# Altium PCB ScopePower.PcbDoc
Units mil, origin at the board's own origin, x right, y up, seen from the top; angles counter-clockwise.
Board outline 1900 x 3300.97 mil, 2 copper layers (Top Layer, Bottom Layer); 37 components, 18 nets, 89 pads, 50 vias.
Unrouted connection lines stored in the file: 2.
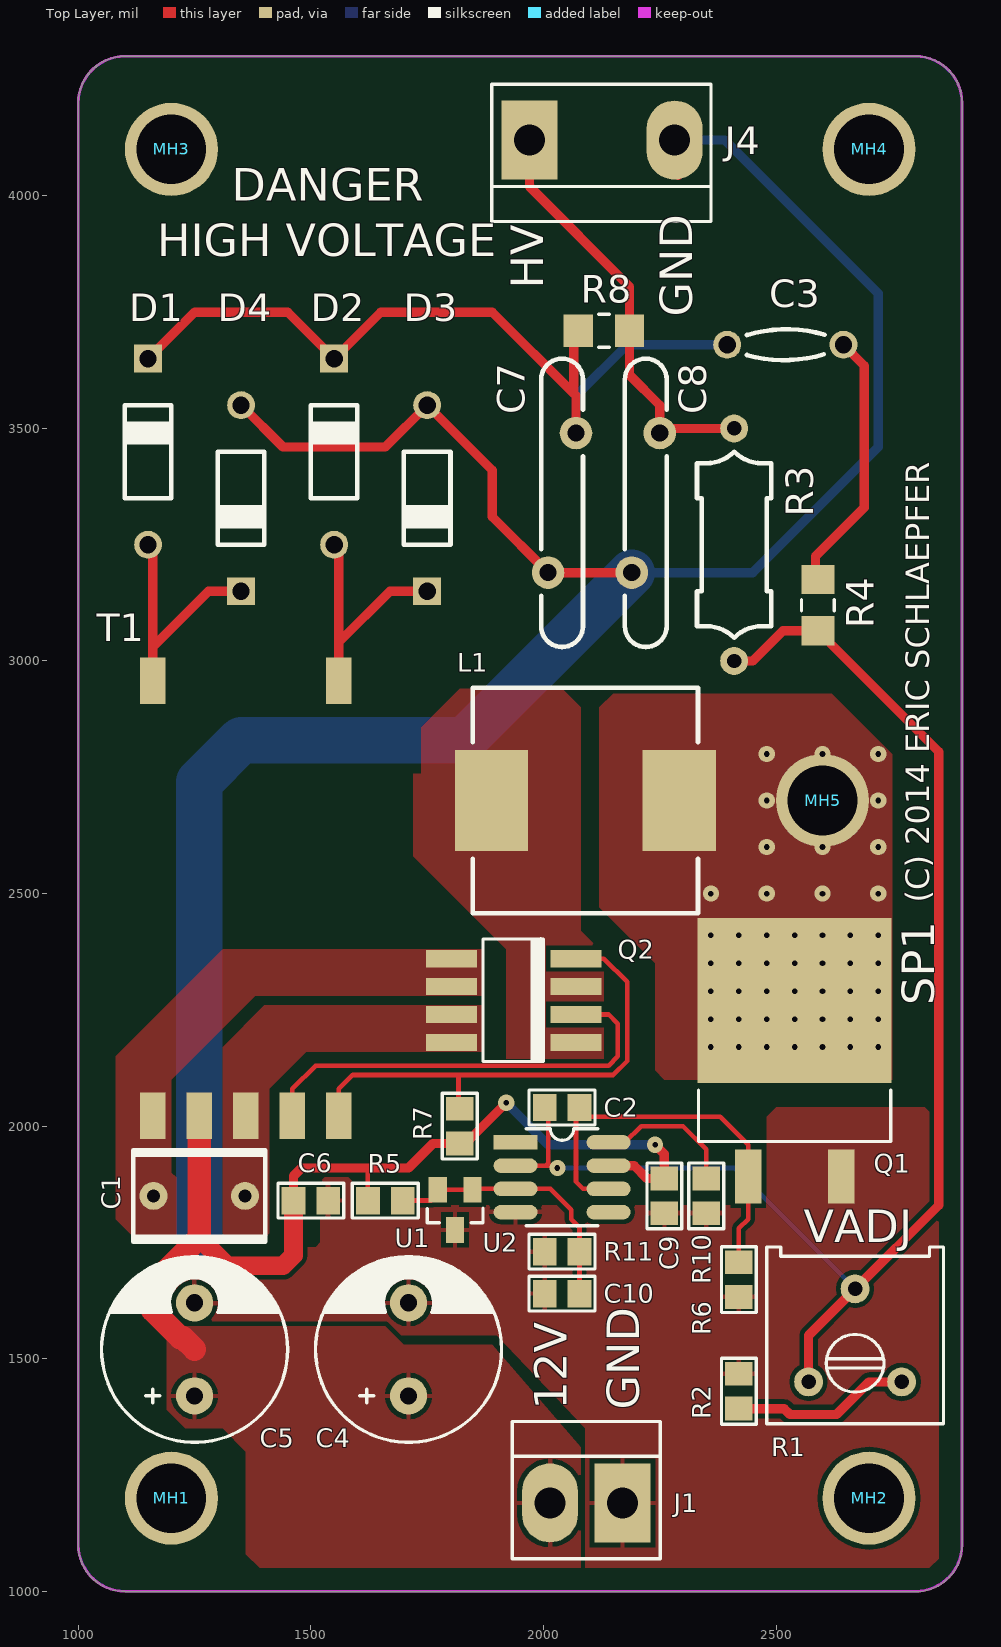
[diagram p0: Top Layer view]
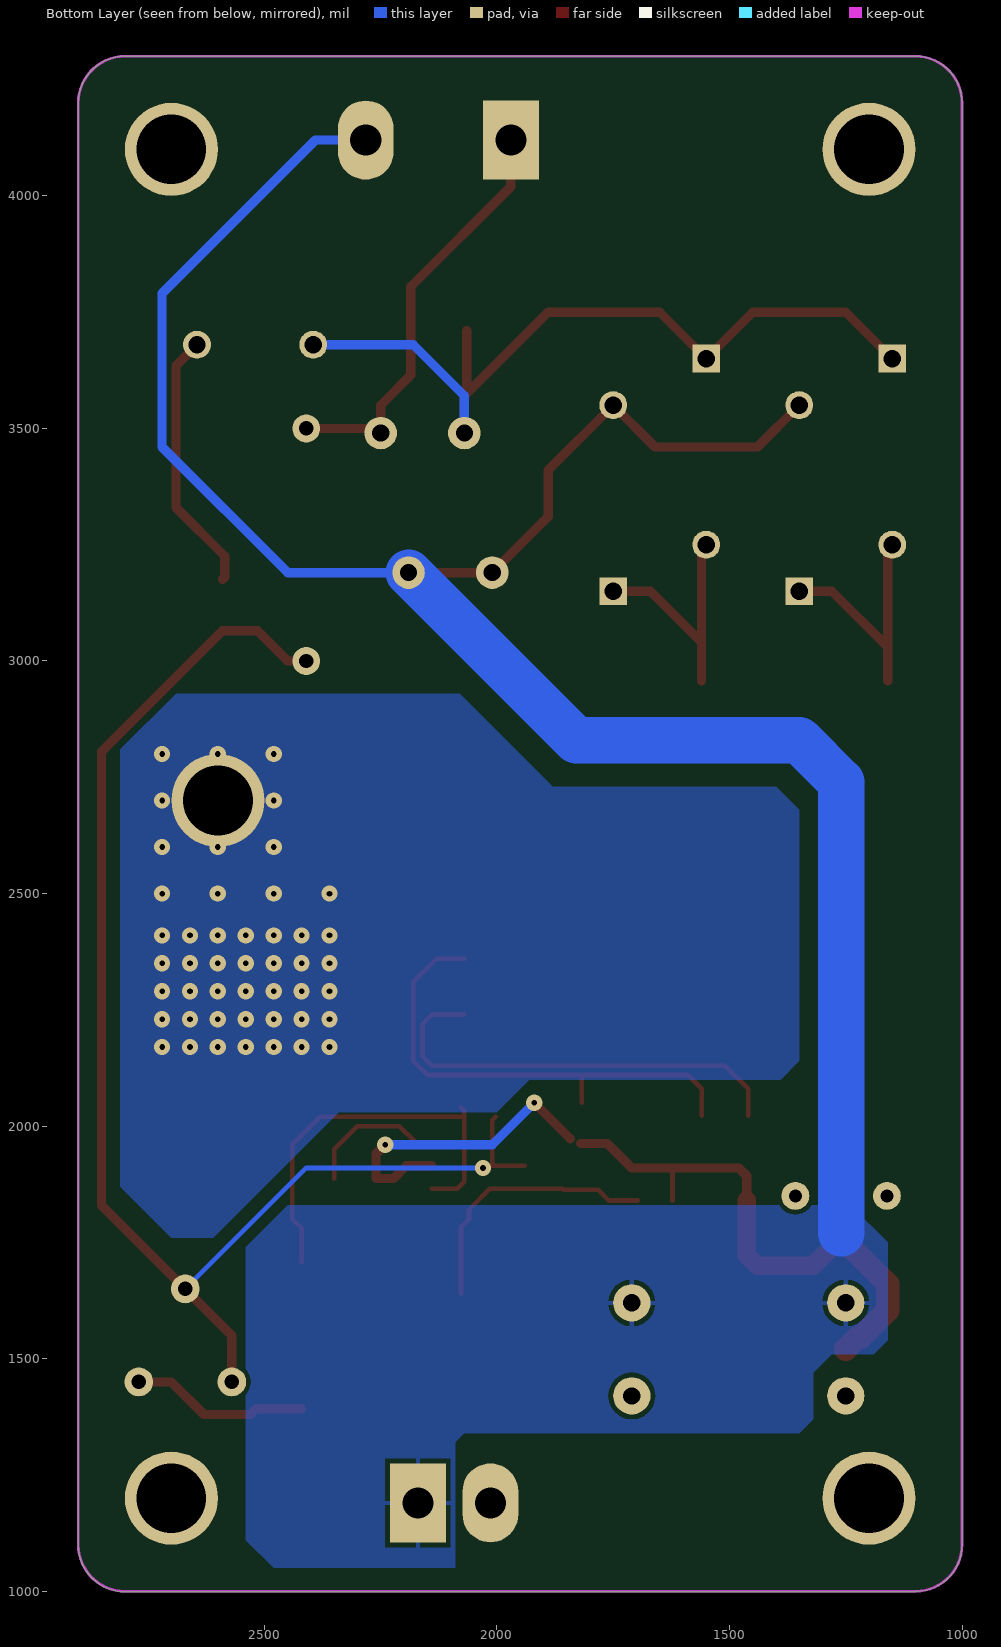
[diagram p1: Bottom Layer view, seen from below]

## Layer stack, top to bottom
Top Solder: solder mask 0.4, Solder Resist, Dk 3.5
Top Layer: signal copper 1.4
Dielectric 1: dielectric 12.6, FR-4, Dk 4.8
Bottom Layer: signal copper 1.4
Bottom Solder: solder mask 0.4, Solder Resist, Dk 3.5

## Board outline
1100,999.52 cw(c1100,1099.52) 1000,1099.52 1000,1100 1000,4200 cw(c1100,4200) 1100,4300 2800,4300 cw(c2800,4200) 2900,4200 2900,1100 2900,1099.03 cw(c2800,1099.03) 2800,999.03 1100,999.03

## Design rules (kind name [scope] priority, off if disabled: settings)
Clearance Clearance_HV [InNetClass('HV')] p1: gap=100
Clearance [All] p2: gap=10
HoleSize [All] p1: absolutevalues=TRUE maxlimit=150 minlimit=12 maxpercent=80.000 minpercent=20.000
PolygonConnect PolyConnectPower [InNet('NetC1_1') or InNet('NetC1_2') or InNet('NetL1_1') or InComponent('Q1') or InComponent('Q2') or InComponent('L1')] p1: connectstyle=Direct reliefconductorwidth=10 reliefentries=4 polygonreliefangle="90 Angle" airgapwidth=10
PolygonConnect [All] p2: connectstyle=Relief reliefconductorwidth=10 reliefentries=4 polygonreliefangle="90 Angle" airgapwidth=10
RoutingVias [All] p1: holewidth=12 width=35 viastyle="Through Hole" minholewidth=12 minwidth=35 maxholewidth=28 maxwidth=50
ShortCircuit ShortCircuit_1 [All vs InNet('NetL1_1')] p1: allowed=TRUE
ShortCircuit [All] p2: allowed=FALSE
SilkToSolderMaskClearance [IsPad] p1: minsilkscreentomaskgap=2 clearancetoexposedcopper=TRUE
SolderMaskExpansion [All] p1: expansion=4
Width [All] p1: maxlimit=200 minlimit=10 preferedwidth=10 minimp=50.000000 maximp=50.000000 favimp=50.000000
26 further rules are at their usual default settings.

## Classes and differential pairs
component class ScopePower: C1 C2 C3 C4 C5 C6 C7 C8 C9 C10 D1 D2 D3 D4 J1 J4 L1 Q1 Q2 R1 R2 R3 R4 R5 R6 R7 R8 R10 R11 T1 U1 U2
net class HV: NetC3_2 NetC8_1 NetD1_A NetD2_A

## Components (designator, comment, footprint, x,y, rotation, side; value= is the part's Value field where it differs from the comment)
C1 "Cap" WIMAMKP2 1260,1850 r0 top
C2 "" G_0805[2012] 2040,2040 r0 top
C3 "3KV" CAP250X100 2520,3680 r180 top
C4 "Cap Pol2" CAP_R200x400 1710,1520 r90 top
C5 "Cap Pol2" CAP_R200x400 1250,1520 r90 top
C6 "" G_0805[2012] 1500,1840 r0 top
C7 "2KV" CAP400X100 2040,3340 r90 top
C8 "2KV" CAP400X100 2220,3340 r270 top
C9 "" G_0805[2012] 2260,1850 r270 top
C10 "Cap" G_0805[2012] 2040,1640 r0 top
D1 "Diode" DIODE400X100 1150,3450 r90 top
D2 "Diode" DIODE400X100 1550,3450 r90 top
D3 "Diode" DIODE400X100 1750,3350 r270 top
D4 "Diode" DIODE400X100 1350,3350 r270 top
J1 "+12V" HDR2S156 2170,1190 r270 top
J4 "HV" HDR3S156M1 1970,4120 r90 top
L1 "DR127-151" DR124 2090,2700 r180 top
MH1 "Comment" M_MTHOLE 1200,1200 r0 top
MH2 "Comment" M_MTHOLE 2700,1200 r0 top
MH3 "Comment" M_MTHOLE 1200,4100 r0 top
MH4 "Comment" M_MTHOLE 2700,4100 r0 top
MH5 "Comment" M_MTHOLE 2600,2700 r0 top
Q1 "FDB3502" G_TO252M[D2PAK] 2540,2140 r0 top
Q2 "ZDT1048" G_SOT223-8 2070,2180 r180 top
R1 "ADJ" "POT_TRIM BOURNS 3386F" 2670,1550 r180 top
R2 "Res1" G_0805[2012] 2420,1430 r270 top
R3 "VR37000001005JR500" RES500X160 2410,3250 r90 top
R4 "*" G_1206[3216] 2590,3120 r90 top
R5 "" G_0805[2012] 1660,1840 r0 top
R6 "" G_0805[2012] 2420,1670 r270 top
R7 "Res1" G_0805[2012] 1820,2000 r270 top
R8 "Res1" G_1206[3216] 2130,3710 r0 top
R10 "" G_0805[2012] 2350,1850 r270 top
R11 "" G_0805[2012] 2040,1730 r180 top
T1 "CCFL_C" CTX2106XX 1360,2490 r0 top
U1 "ZTL431A" G_SOT23 1810,1820 r180 top
U2 "TS271" G_SO8 2040,1890 r0 top

## Footprints (in the part's own frame and the unit in brackets; to place one, negate y for a bottom-side part, rotate by r counter-clockwise, add the part's x,y. Pads: shape width x height; smd on the part's side, far side on the other; paste and mask are expansions set on the pad)
CAP250X100 [mil] "Capacitor, 250mil x 100mil"
  round 60 hole 37: 1(-125,0) 2(125,0)
  silkscreen extent -84,-33 83,33
CAP400X100 [mil] "Capacitor, 400mil x 100mil"
  round 70 hole 37: 1(-150,30) 2(150,-30)
  silkscreen extent -310,-45 310,45
CAP_R200x400 [mil]
  round 80 hole 37: 1(-100,0) 2(100,0)
  silkscreen extent -200,-200 200,200, body extent -200,-200 200,200, height 800
CTX2106XX [mil] "Coiltronics CCFL Transformer Layout C"
  rect 55x100 smd: 1(-200,-467.5) 2(-100,-467.5) 3(0,-467.5) 4(100,-467.5) 5(200,-467.5) 6(200,467.5) 10(-200,467.5)
  body extent -325,-413 325,413, height 276
DIODE400X100 [mil] "Diode, 400mil x 100mil"
  round 60 hole 37: A(-200,0)
  rect 60x60 hole 37: K(200,0)
  silkscreen extent -100,-50 100,50
DR124 [mm]
  rect 4x5.5 smd: 1(-5.125,0) 2(5.125,0)
  silkscreen extent -6.15,-6.15 6.15,6.15
G_0805[2012] [mm] "Generic 0805"
  rect 1.3x1.5 smd: 1(-0.95,0) 2(0.95,0)
  silkscreen extent -1.8,-0.95 1.8,0.95, body extent -1,-0.6 1,0.6
G_1206[3216] [mm] "Generic 1206"
  rect 1.6x1.8 smd: 1(-1.4,0) 2(1.4,0)
  silkscreen extent -0.3,-0.9 0.3,0.9, body extent -1.6,-0.8 1.6,0.8
G_SO8 [mm]
  rect 2.4x0.8 smd: 1(-2.54,1.905)
  oval 2.4x0.8 smd: 2(-2.54,0.635) 3(-2.54,-0.635) 4(-2.54,-1.905) 5(2.54,-1.905) 6(2.54,-0.635) 7(2.54,0.635) 8(2.54,1.905)
  silkscreen extent -1.96,-2.64 1.96,2.65, body extent -2.03,-2.54 2.03,2.54
G_SOT23 [mm]
  rect 1x1.4 smd: 1(-0.95,-1.1) 2(0.95,-1.1) 3(0,1.1)
  silkscreen extent -1.52,-0.1 1.52,0.71, body extent -1.45,-0.64 1.45,0.64
G_SOT223-8 [mil] "SOT223, 8-Leads"
  rect 110x37 smd: 1(0,0) 2(0,-60) 3(0,-120) 4(0,-180) 5(268,-180) 6(268,-120) 7(268,-60) 8(268,0)
  silkscreen extent 70,-223 200,41, body extent 61,-222 207,41, height 71
G_TO252M[D2PAK] [mm]
  rect 10.6x9 smd: D(0,3.3)
  rect 1.45x2.95 smd: G(-2.54,-6.3) S(2.54,-6.3)
  silkscreen extent -5.25,-4.4 5.25,-1.6, body extent -5.25,-1.6 5.25,7.8
HDR2S156 [mil]
  rect 170x120 hole 67: 1(0,0)
  oval 170x120 hole 67: 2(0,-156)
  silkscreen extent -175,-237 120,81, body extent -194,-231 200,75, height 585
HDR3S156M1 [mil]
  rect 170x120 hole 67: 1(0,0)
  oval 170x120 hole 67: 2(0,-312)
  silkscreen extent -175,-390 120,81
M_MTHOLE [mil]
  round 200 hole 150: 1(0,0)
"POT_TRIM BOURNS 3386F" [mil]
  round 62 hole 31: 1(-100,100) 2(100,100) 3(0,-100)
  silkscreen extent -190,-190 190,190, body extent -190,-190 190,190
RES500X160 [mil] "Resistor, 500mil x 160mil"
  round 60 hole 31: 1(-250,0) 2(250,0)
  silkscreen extent -200,-80 200,80
WIMAMKP2 [mil] "Wima Capacitor, MPK2 Series"
  round 60 hole 27.99: 1(-98.43,0) 2(98.43,0)
  silkscreen extent -142,-98 142,98, body extent -142,-89 142,89, height 374

## Part data
C1 C10: "Capacitor"
C2 C3 C6 C7 C8 C9: library part Cap, "Capacitor"
C4 C5: library part CapP, "Polarized Capacitor"
J1 J4: library part CON2, "Connector, 2 pin"
L1: library part Inductor, "Inductor"
Q1: library part MOSFET-N, "N-Channel MOSFET"
Q2: library part NPN_DUAL, "NPN Dual Bipolar Transistor"
R1: library part Pot, "Variable Resistor"
R2 R4 R5 R6 R7 R8 R10 R11: library part Res, "Resistor"
R3: library part ResSpecial, "Resistor, Special Property"
T1: "CCFL Transformer"
U1: library part TL431, "Adjustable Shunt Reg"
U2: library part OpAmpSingle, "Generic Single Op Amp"

## Via types
v1: diameter 35, hole 12, Top Layer to Bottom Layer, 50 vias

## Nets (pads, with @x,y where several pads share a name; then routed paths per layer and width w, separated by ;. In a path a pad name is that pad's centre, name@x,y a point inside that pad or via, vN(x,y) a via of type N, cw(c..) or ccw(c..) an arc to the next point about the centre after c; other vN are vias at no path point)
GND: C4.2 C5.2 C6.2 C7.1 C8.2 C9.2 C10.1 D3.A D4.A J1.1 J4.2 Q1.S R2.1 R6.2 R10.2 R11.2 U1.3 U2.4 | length 4830.9
  Top Layer w20: D4.A 1440,3460 1660,3460 D3.A 1890,3410 1890,3310 C7.1 C8.2 ; J4.2@2290,4044.29 J4.2@2290,4120
  Bottom Layer w20: C8.2 2450,3190 2720,3460 2720,3790 2390,4120 J4.2
  Bottom Layer w100: 1260,1770 1260,2740 1350,2830 1830,2830 C8.2
NetC1_1: C1.1 Q2.5 Q2.6 T1.1
NetC1_2: C1.2 Q2.7 Q2.8 T1.3
NetC2_1: C2.1 R1.2 R1.3 R3.1 R4.1 U2.2 | length 3012.4
  Top Layer w10: U2.2 v1@2015,1915 ; C2.1@2002.6,2020 2010,2012.6 2010,1920 2005,1915 v1@2015,1915 ; v1(2030,1910) v1@2020,1910 ; v1@2015,1915 v1@2020,1910 ; v1@2015,1915 v1@2020,1910
  Top Layer w20: R3.1 2450,3000 2514.88,3064.88 R4.1 2850,2804.88 2850,1830 R1.3 2570,1550 R1.2
  Bottom Layer w10: v1(2030,1910) 2410,1910 R1.3
NetC2_2: C2.2 Q1.G R6.1 U2.6 | length 887.6
  Top Layer w10: C2.2@2077.4,2020 2380,2020 2440,1960 Q1.G 2440,1800 2420,1780 R6.1 ; C2.2 2070,2032.6 2070,1880 2085,1865 U2.6
NetC3_1: C3.1 R4.2 | length 569.1
  Top Layer w20: R4.2 2585,3180.12 2585,3225 2690,3330 2690,3635 C3.1
NetC3_2: C3.2 C7.2 D1.K D2.K R8.1 | length 1784.3
  Top Layer w20: D1.K 1250,3750 1450,3750 D2.K 1650,3750 1890,3750 2064.88,3575.12 ; R8.1@2064.88,3710 2064.88,3575.12 ; C7.2 2070,3570 2064.88,3575.12
  Bottom Layer w20: C7.2 2070,3570 2180,3680 C3.2
NetC8_1: C8.1 J4.1 R3.2 R8.2 | length 910.1
  Top Layer w20: J4.1 1970,4020 2185.12,3804.88 R8.2 2185.12,3614.88 2250,3550 C8.1 2260,3500 R3.2
NetC10_2: C10.2 R5.2 R11.1 U1.1 U1.2 U2.3 | length 578.8
  Top Layer w10: R5.2 1759.29,1840 1782.6,1863.31 1857.4,1863.31 1859.09,1865 U2.3 2015,1865 2060,1820 2060,1800 2077.4,1782.6 R11.1 C10.2
NetD1_A: D1.A D4.K T1.10 | length 536.3
  Top Layer w20: D1.A 1160,3240 1160,3030 ; T1.10 1160,3030 ; D4.K 1280,3150 1160,3030
NetD2_A: D2.A D3.K T1.6 | length 532.2
  Top Layer w20: D2.A 1560,3240 1560,3040 ; T1.6 1560,3040 ; D3.K 1670,3150 1560,3040
NetL1_1: L1.1 MH5.1 Q1.D
  other v1: 2360,2170 2420,2170 2480,2170 2540,2170 2600,2170 2660,2170 2720,2170 2360,2230 2420,2230 2480,2230 2540,2230 2600,2230 2660,2230 2720,2230 2360,2290 2420,2290 2480,2290 2540,2290 2600,2290 2660,2290 2720,2290 2360,2350 2420,2350 2480,2350 2540,2350 2600,2350 2660,2350 2720,2350 2360,2410 2420,2410 2480,2410 2540,2410 2600,2410 2660,2410 2720,2410 2360,2500 2480,2500 2600,2500 2720,2500 2480,2600 2600,2600 2720,2600 2480,2700 2720,2700 2480,2800 2600,2800 2720,2800
NetL1_2: L1.2 Q2.1 Q2.3
NetQ2_2: Q2.2 T1.4 | length 954.8
  Top Layer w10: T1.4 1460,2080 1510,2130 2140,2130 2160,2150 2160,2220 2140,2240 Q2.2
NetQ2_4: Q2.4 R7.1 T1.5 | length 1063.1
  Top Layer w10: T1.5 1560,2080 1590,2110 1817.4,2110 ; R7.1@1817.4,2050 1817.4,2110 ; Q2.4 2130,2360 2180,2310 2180,2140 2150,2110 1817.4,2110
NetR1_1: R1.1 R2.2 | length 384.2
  Top Layer w20: R2.2 2517.4,1392.6 2530,1380 2630,1380 2700,1450 R1.1
NetR10_1: R10.1 U2.8 | length 307.8
  Top Layer w10: U2.8 2175,1965 2210,2000 2300,2000 2350,1950 R10.1
VCC: C4.1 C5.1 C6.1 C9.1 J1.2 R5.1 R7.2 T1.2 U2.7 | length 2074.4
  Top Layer w10: R5.1 1622.6,1907.4
  Top Layer w20: C6.1 1462.6,1892.6 1480,1910 1710,1910 1762.6,1962.6 R7.2 ; R7.2@1842.6,1972.6 v1(1920,2050) ; U2.7 2195,1915 2222.6,1887.4 C9.1 2260,1940 v1(2240,1960)
  Top Layer w40: 1260,1760 1320,1700 1440,1700 1462.6,1722.6 C6.1
  Top Layer w50: 1250,1520 1225,1545 1218.93,1545 1160,1603.93 1160,1660 1260,1760 T1.2@1260,1972.5
  Bottom Layer w20: v1(1920,2050) 2010,1960 v1(2240,1960)
pads on no net: MH1.1 MH2.1 MH3.1 MH4.1 U2.1 U2.5

## Polygon pours and split planes (outlines as drawn)
VCC on Top Layer "Top Overlay-No Net" (solid, pour order 11): 1190,1550 1210,1570 1660,1570 1700,1530 1890,1530 2080,1310 2080,1050 1390,1050 1360,1080 1360,1300 1310,1350 1230,1350 1190,1390
NetC1_2 on Top Layer "Top Overlay-No Net" (solid, pour order 10): 1310,1770 1330,1750 1390,1750 1410,1770 1410,2080 1490,2160 1870,2160 1870,2260 1400,2260 1310,2170
NetC1_1 on Top Layer "Top Overlay-No Net" (solid, pour order 9): 1080,1800 1130,1750 1200,1750 1210,1760 1210,1890 1200,1900 1200,2100 1380,2280 1870,2280 1870,2380 1310,2380 1080,2150
NetL1_1 on Top Layer "Top Overlay-No Net" (solid, pour order 14): 2150,2930 2620,2930 2750,2800 2750,2100 2260,2100 2240,2120 2240,2350 2120,2470 2120,2900
GND on Top Layer "Top Overlay-No Net" (solid, pour order 15): 1520,1750 1520,1880 1540,1900 1570,1900 1640,1830 2460,1830 2480,1850 2480,2020 2500,2040 2820,2040 2850,2010 2850,1070 2830,1050 2090,1050 2090,1350 1900,1550 1200,1550 1200,1740 1510,1740
NetL1_2 on Top Layer "Top Overlay-No Net" (solid, pour order 12): 1820,2940 2040,2940 2080,2900 2080,2420 2130,2370 2130,2130 1920,2130 1920,2380 1720,2580 1720,2840
NetL1_1 on Bottom Layer "Top Overlay-No Net" (solid, pour order 13): 2080,2930 2690,2930 2810,2810 2810,1870 2700,1760 2610,1760 2340,2030 2000,2030 1930,2100 1390,2100 1350,2140 1350,2680 1400,2730 1880,2730
GND on Bottom Layer "Top Overlay-No Net" (solid, pour order 16): 1320,1370 1350,1340 2070,1340 2090,1320 2090,1050 2480,1050 2540,1110 2540,1740 2450,1830 1240,1830 1160,1750 1160,1540 1190,1510 1280,1510 1320,1470

## Keep-outs
Keep-Out Layer:
  lines w6: 1000,1100 ccw(c1100,1100) 1100,1000 2800,1000 ccw(c2800,1100) 2900,1100 2900,4200 ccw(c2800,4200) 2800,4300 1100,4300 ccw(c1100,4200) 1000,4200 1000,1100

## Silkscreen, mask and mechanical layers (free items; w line width, h text height)
Top Overlay:
  text "DANGER" at 1330,3990 h70
  text "HIGH VOLTAGE" at 1170,3870 h70
  text "HV" at 2000,3800 h70 r90
  text "GND" at 2320,3740 h70 r90
  text "(C) 2014 ERIC SCHLAEPFER" at 2830,2480 h50 r90
  text "SP1" at 2840,2260 h70 r90
  text "VADJ" at 2560,1750 h70
  text "12V" at 2050,1390 h70 r90
  text "GND" at 2206,1390 h70 r90